# Altium PCB rhd_board_rev1_2_long_link.PcbDoc
Units mm, origin at the board's own origin, x right, y up, seen from the top; angles counter-clockwise.
Board outline 13.23 x 25.69 mm, 3 copper layers (Top Layer, GND, Bottom layer), stack 0.13 mm thick; 28 components, 58 nets, 183 pads, 71 vias.
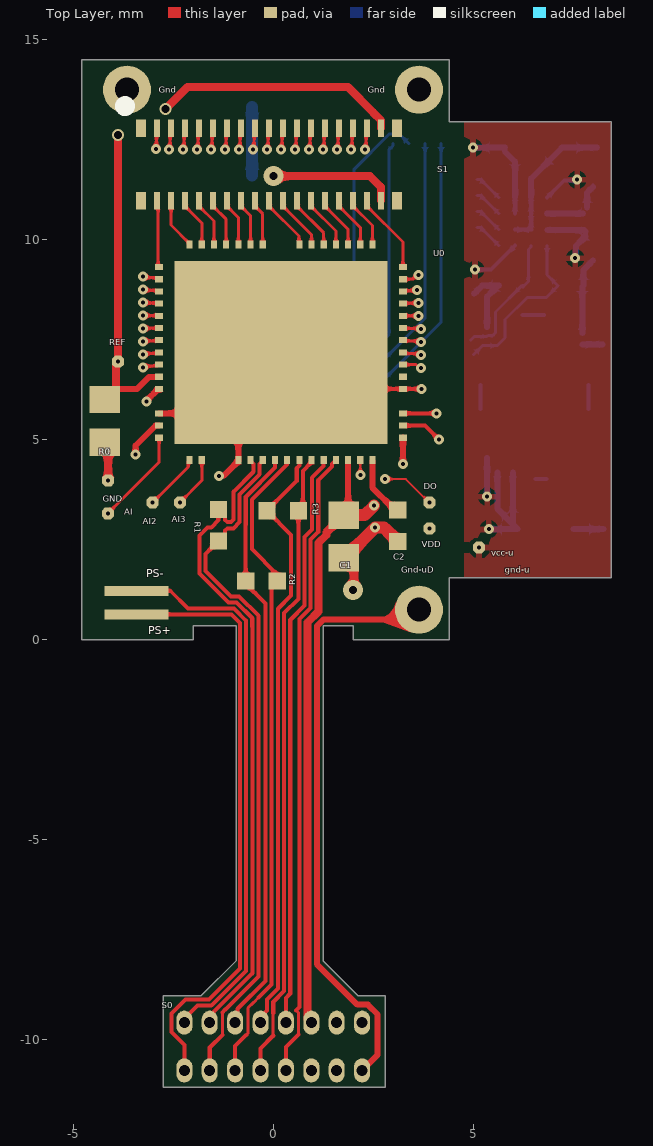
[diagram p0: Top Layer view]
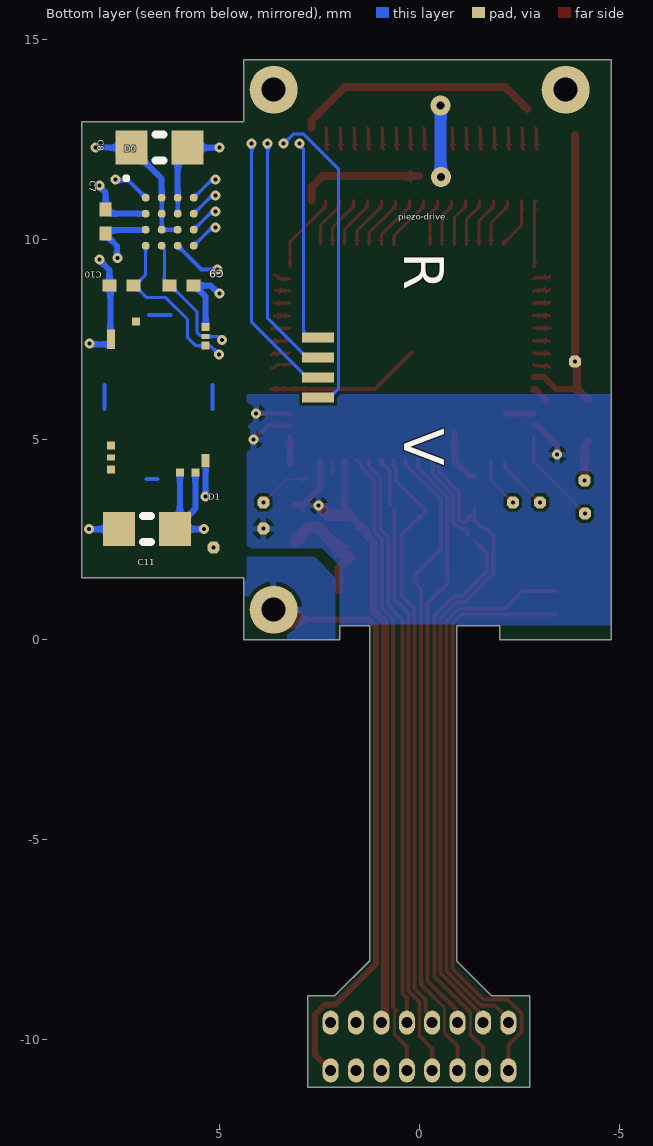
[diagram p1: Bottom layer view, seen from below]
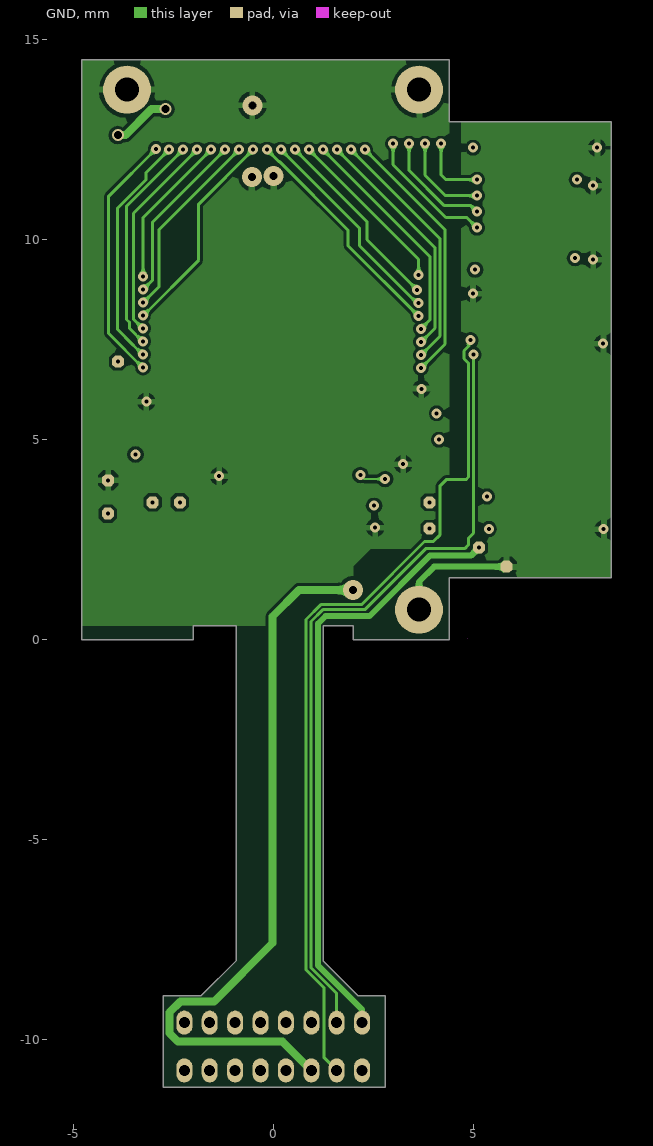
[diagram p2: GND]

## Layer stack, top to bottom
Top Layer: signal copper 0.012
Dielectric 1: core 0.022, FR-4, Dk 4.2
Adhesive 1: prepreg 0.025, Dk 4.2
GND: signal copper 0.012
Adhesive 2: prepreg 0.025, Dk 4.2
Dielectric 2: core 0.022, FR-4, Dk 4.2
Bottom layer: signal copper 0.012

## Board outline
-1.797,-8.902 -0.925,-8.03 -0.925,0.35 -2,0.35 -2,0 -4.782,0 -4.782,14.5 4.4,14.5 4.4,12.95 8.45,12.95 8.45,1.55 4.4,1.55 4.4,0 2,0 2,0.35 1.25,0.35 1.25,-8.025 2.127,-8.902 2.805,-8.902 2.805,-11.193 -2.745,-11.192 -2.745,-8.902
board region omnetics: 1.25,-8.02 1.25,-8.025 2.127,-8.902 2.805,-8.902 2.805,-11.193 -2.745,-11.192 -2.745,-8.902 -1.797,-8.902 -0.925,-8.03 -0.925,-8.02
board region intan-omnetics: -0.925,-8.02 -0.925,0.3 1.25,0.3 1.25,-8.02
board region drive: 4.7,12.95 8.45,12.95 8.45,1.55 4.7,1.55
board region intan-drive: 4.7,1.55 4.4,1.55 4.4,12.95 4.7,12.95
board region intan: -0.925,0.3 -0.925,0.35 -2,0.35 -2,0 -4.783,0 -4.783,14.5 4.4,14.5 4.4,0 2,0 2,0.35 1.25,0.35 1.25,0.3

## Design rules (kind name [scope] priority, off if disabled: settings)
Clearance [All] p1: gap=0.075 ignorepadtopadclearanceinfootprint=TRUE except(0.05: Track-Track)
ComponentClearance [All] p1: gap=0.102 collisioncheckmode=3 verticalgap=0.254 showdistances=TRUE
DiffPairsRouting DiffPair_DiffPairsRouting [InDifferentialPairClass('New Class')] p1: maxlimit=0.203 minlimit=0.051 mostfreqgap=0.102 toplayer_minwidth=0.05 toplayer_maxwidth=0.203 toplayer_prefwidth=0.102 midlayer2_minwidth=0.05 midlayer2_maxwidth=0.203 midlayer2_prefwidth=0.102 bottomlayer_minwidth=0.05 bottomlayer_maxwidth=0.203 bottomlayer_prefwidth=0.102 maxuncoupledlength=12.7
DiffPairsRouting [InDifferentialPairClass('All Differential Pairs')] p2: maxlimit=2.54 minlimit=0.127 mostfreqgap=0.127 toplayer_minwidth=0.076 toplayer_maxwidth=0.381 toplayer_prefwidth=0.254 midlayer2_minwidth=0.076 midlayer2_maxwidth=0.381 midlayer2_prefwidth=0.254 bottomlayer_minwidth=0.076 bottomlayer_maxwidth=0.381 bottomlayer_prefwidth=0.254 maxuncoupledlength=12.7
HoleToHoleClearance [All] p1: gap=0.225 allowstackedmicrovias=TRUE
LayerPairs [All] p1 off: enforce=TRUE
MatchedLengths DiffPair_MatchedLengths [InDifferentialPairClass('New Class')] p1: tolerance=25.4 checknetsindiffpair=TRUE checkdiffpairvsdiffpair=FALSE checkxsignals=FALSE checkothers=FALSE
MatchedLengths DiffPair_MatchedLengths_mosi [InDifferentialPair ('D_MOSI')] p2 off: tolerance=25.4 checknetsindiffpair=TRUE checkdiffpairvsdiffpair=FALSE checkxsignals=FALSE checkothers=FALSE
MinimumSolderMaskSliver [All] p1: minsoldermaskwidth=0.025
PasteMaskExpansion [All] p1 off: expansion=0
PermittedLayers [All] p1: toplayerpermitted=TRUE bottomlayerpermitted=TRUE
PlaneConnect [All] p1: pad.planeconnectstyle=Relief pad.reliefexpansion=0.508 pad.reliefentries=4 pad.reliefconductorwidth=0.254 pad.reliefairgap=0.254 via.planeconnectstyle=Direct via.reliefexpansion=0.508 via.reliefentries=4 via.reliefconductorwidth=0.254 via.reliefairgap=0.254
PolygonConnect [All] p1: connectstyle=Relief reliefconductorwidth=0.15 reliefentries=4 polygonreliefangle="90 Angle" airgapwidth=0.1
RoutingCorners [All] p1: cornerstyle=Round minsetback=2.54 maxsetback=2.54
RoutingVias [All] p1: holewidth=0.1 width=0.35 viastyle="Through Hole" minholewidth=0.1 minwidth=0.25 maxholewidth=0.2 maxwidth=0.5
SilkToSilkClearance [All] p1: silktosilkclearance=0.102
SilkToSolderMaskClearance [IsPad] p1 off: minsilkscreentomaskgap=0.102 clearancetoexposedcopper=TRUE
SolderMaskExpansion [All] p1 off: expansion=0.075
UnRoutedNet [All] p1: checkbadconnections=TRUE
Width Width_elect_net [InNetClass('electrode_net')] p1: maxlimit=0.15 minlimit=0.05 preferedwidth=0.075
Width Width_width [InNetClass('signal_net')] p2: maxlimit=0.15 minlimit=0.05 preferedwidth=0.075
Width Width_power [InNetClass('pow_net')] p3: maxlimit=0.3 minlimit=0.1 preferedwidth=0.2
Width Width_signal [InNetClass('All Nets')] p4: maxlimit=0.15 minlimit=0.05 preferedwidth=0.075
19 further rules are at their usual default settings.

## Classes and differential pairs
net class pow_net: GND NetC2_1 NetR0_2 STIM+ STIM- VCC VCC-udrive
net class signal_net: CS+ CS- MISO+ MISO- MOSI+ MOSI- NetAI2_1 NetAI3_1 NetAI_1 NetS1_B1 NetS1_B2 NetS1_B3 NetS1_B4 NetS1_B5 NetS1_B6 NetS1_B7 NetS1_B8 NetS1_B9 NetS1_B10 NetS1_B11 NetS1_B12 NetS1_B13 NetS1_B14 NetS1_B15 NetS1_B16 SCL SCLK+ SCLK- SDA
differential pair class "New Class": D_CS D_MISO D_MOSI D_SCLK
net class electrode_net: NetS1_B1 NetS1_B2 NetS1_B3 NetS1_B4 NetS1_B5 NetS1_B6 NetS1_B7 NetS1_B8 NetS1_B9 NetS1_B10 NetS1_B11 NetS1_B12 NetS1_B13 NetS1_B14 NetS1_B15 NetS1_B16 S0 S1 S2 S3 S4 S5 S6 S7 S24 S25 S26 S27 S28 S29 S30 S31
differential pair D_SCLK: +SCLK+ -SCLK-
differential pair D_CS: +CS+ -CS-
differential pair D_MOSI: +MOSI+ -MOSI-
differential pair D_MISO: +MISO+ -MISO-

## Components (designator, comment, footprint, x,y, rotation, side; value= is the part's Value field where it differs from the comment)
AI "PCB Test Point" TESTPOINT_SMALL#1 -4.13,3.155 r0 top
AI2 "PCB Test Point" TESTPOINT_SMALL#1 -3.007,3.433 r90 top
AI3 "PCB Test Point" TESTPOINT_SMALL#1 -2.328,3.433 r90 top
C1 "Capacitor" 0402 1.77,2.584 r270 top
C2 "Capacitor" 0201 3.117,2.85 r270 top
C7 "470n" CAPC0603X03L 7.85,10.45 r270 bottom
C8 "10u" CAPC1608X09L 6.5,12.3 r180 bottom
C9 "470n" CAPC0603X03L 5.95,8.85 r0 bottom
C10 "470n" CAPC0603X03L 7.45,8.85 r0 bottom
C11 "10u" CAPC1608X09L 6.818,2.768 r0 bottom
D0 "NSD-2101" BGA16C40P4X4_175X175X63 6.25,10.45 r180 bottom
D1 "NSE-5310_FC" NSE-5310_FC 7.157,4.07 r90 bottom
DO "PCB Test Point" TESTPOINT_SMALL#1 3.91,3.433 r90 top
GND "PCB Test Point" TESTPOINT_SMALL#1 -4.122,3.985 r90 top
gnd-u "PCB Test Point" TESTPOINT_SMALL#2 5.887,2.062 r90 top
piezo-drive "sql-rv-1.8-6-12" sql-rv-1.8-6-12 -1.51,10.235 r0 bottom
PS+ "2-2" KP-025-04 -3.42,0.633 r180 top
PS- "2-2" KP-025-04 -3.42,1.225 r180 top
R0 "Resistor" 0402 -4.207,5.473 r90 top
R1 "Resistor" 0201 -1.365,2.863 r270 top
R2 "Resistor" 0201 -0.29,1.468 r0 top
R3 "Resistor" 0201 0.241,3.227 r0 top
REF "PCB Test Point" TESTPOINT_SMALL#3 -3.878,6.95 r90 top
S0 "Omnetics_PZN-16-DD" OMNETICS_PZN-16-DD 0.002,-10.195 r180 top
S1 "Molex 3.5mm Pitch Slimstack 34 pin connector" MOLEX_504622-3412 -0.1,11.842 r0 top
U0 "Intan Technologies RHD2132 chip" RHD2000_56PIN_COB 0.2,7.184 r0 top
vcc-u "PCB Test Point" TESTPOINT_SMALL#1 5.15,2.305 r90 top
VDD "PCB Test Point" TESTPOINT_SMALL#1 3.91,2.78 r90 top

## Footprints (in the part's own frame and the unit in brackets; to place one, negate y for a bottom-side part, rotate by r counter-clockwise, add the part's x,y. Pads: shape width x height; smd on the part's side, far side on the other; paste and mask are expansions set on the pad)
0201 [mil]
  rect 17x17 smd: 1(-15.5,0) 2(15.5,0)
0402 [mil]
  rect 27x30 smd: 1(-21,0) 2(21,0)
BGA16C40P4X4_175X175X63 [mm]
  round 0.2 smd: A1(-0.6,0.6) A2(-0.2,0.6) A3(0.2,0.6) A4(0.6,0.6) B1(-0.6,0.2) B2(-0.2,0.2) B3(0.2,0.2) B4(0.6,0.2) C1(-0.6,-0.2) C2(-0.2,-0.2) C3(0.2,-0.2) C4(0.6,-0.2) D1(-0.6,-0.6) D2(-0.2,-0.6) D3(0.2,-0.6) D4(0.6,-0.6)
  silkscreen extent -1.14,1.04 -1.04,1.14, body extent -0.87,-0.88 0.88,0.87, height 0.25
CAPC0603X03L [mm]
  rect 0.35x0.3 smd: 1(-0.3,0) 2(0.3,0)
  body extent -0.67,-0.35 0.67,0.35, height 0.33
CAPC1608X09L [mm]
  rect 0.8x0.85 smd: 1(-0.7,0) 2(0.7,0)
  silkscreen extent -0.1,-0.33 0.1,0.33, body extent -1.25,-0.58 1.25,0.58, height 0.95
KP-025-04 [mm]
  rect 1.6x0.25 smd: 1(0,0)
  body extent -0.9,-0.23 0.9,0.23, height 0.03
MOLEX_504622-3412 [mm]
  rect 0.25x0.435 smd paste+0 mask+0.035: A(-3.2,0.95) B(3.2,0.95) C(-3.2,-0.865) D(3.2,-0.865)
  rect 0.16x0.435 smd paste+0 mask+0.035: B1(-2.8,-0.865) B2(-2.45,-0.865) B3(-2.1,-0.865) B4(-1.75,-0.865) B5(-1.4,-0.865) B6(-1.05,-0.865) B7(-0.7,-0.865) B8(-0.35,-0.865) B9(0,-0.865) B10(0.35,-0.865) B11(0.7,-0.865) B12(1.05,-0.865) B13(1.4,-0.865) B14(1.75,-0.865) B15(2.1,-0.865) B16(2.45,-0.865) B17(2.8,-0.865) T1(-2.8,0.95) T2(-2.45,0.95) T3(-2.1,0.95) T4(-1.75,0.95) T5(-1.4,0.95) T6(-1.05,0.95) T7(-0.7,0.95) T8(-0.35,0.95) T9(0,0.95) T10(0.35,0.95) T11(0.7,0.95) T12(1.05,0.95) T13(1.4,0.95) T14(1.75,0.95) T15(2.1,0.95) T16(2.45,0.95) T17(2.8,0.95)
  silkscreen extent -3.72,1.38 -3.47,1.62, body extent -3.62,-1 3.62,1, height 0.46
NSE-5310_FC [mm]
  rect 0.2x0.2 smd: 3(0.19,0.56) 5(0.781,0.56) 7(3.295,0.56) 8(3.484,0.56) 8(3.587,0.56) 9(3.888,-0.057) 11(3.75,-1.807) 13(3.28,-1.807) 18(0.351,-1.807) 18(0.468,-1.807) 19(0.112,-1.549) 19(0.112,-1.161)
  rect 0.15x0.2 smd: 4(0.48,0.56)
  rect 0.116x0.116 smd: 8(3.484,0.56) 18(0.401,-1.807)
  rect 0.116x0.2 smd: 12(3.51,-1.807)
  Top Layer lines w0.1: 1.7,-1.973 2.3,-1.973 ; 4.05,-0.923 4.05,-0.386 ; -0.05,-0.6 -0.05,-0.323 ; 1.7,0.727 2.3,0.727
  body extent -0.2,-2.12 4.2,0.88, height 1.02
OMNETICS_PZN-16-DD [mm]
  oval 0.4x0.6 hole 0.275 mask+0.05: B1(2.219,0.571) B2(1.584,0.571) B3(0.949,0.571) B4(0.314,0.571) B5(-0.321,0.571) B6(-0.956,0.571) B7(-1.591,0.571) B8(-2.226,0.571) T1(2.219,-0.622) T2(1.584,-0.622) T3(0.949,-0.622) T4(0.314,-0.622) T5(-0.321,-0.622) T6(-0.956,-0.622) T7(-1.591,-0.622) T8(-2.226,-0.622)
RHD2000_56PIN_COB [mil]
  rect 8x6 smd paste+0: 1(-120,84) 2(-120,72) 3(-120,60) 4(-120,48) 5(-120,36) 6(-120,24) 7(-120,12) 8(-120,0) 9(-120,-12) 10(-120,-24) 11(-120,-36) 12(-120,-60) 13(-120,-72) 14(-120,-84) 29(120,-84) 30(120,-72) 31(120,-60) 32(120,-36) 33(120,-24) 34(120,-12) 35(120,0) 36(120,12) 37(120,24) 38(120,36) 39(120,48) 40(120,60) 41(120,72) 42(120,84)
  rect 6x8 smd paste+0: 15(-90,-106) 16(-78,-106) 17(-42,-106) 18(-30,-106) 19(-18,-106) 20(-6,-106) 21(6,-106) 22(18,-106) 23(30,-106) 24(42,-106) 25(54,-106) 26(66,-106) 27(78,-106) 28(90,-106) 43(90,106) 44(78,106) 45(66,106) 46(54,106) 47(42,106) 48(30,106) 49(18,106) 50(-18,106) 51(-30,106) 52(-42,106) 53(-54,106) 54(-66,106) 55(-78,106) 56(-90,106)
  rect 210x180 smd paste+0: CENTER(0,0)
sql-rv-1.8-6-12 [mm]
  rect 0.8x0.25 smd: P1-1(4.05,2.685) P1-2(4.05,4.185) P2-1(4.05,3.185) P2-2(4.05,3.685)
  Top Layer region: 0.05,0
  Top Layer region: 0.05,0
  body extent 0.05,0 4.55,6, height 2.77
TESTPOINT_SMALL#1 [mm]
  oct 0.3x0.3 hole 0.1: 1(0,0)
TESTPOINT_SMALL#2 [mm]
  oct 0.3x0.3 on Mid2: gndupad(-0.237,0.05)
TESTPOINT_SMALL#3 [mm]
  oct 0.3x0.3 hole 0.1 paste+0.1: 1(0,0)

## Part data
AI AI2 AI3 DO GND gnd-u REF vcc-u VDD: library part TESTPOINT_SMALL, DeviceName=_SMALL, DeviceSetName=TESTPOINT, GateName_1=TP$1, LibraryName=RHD2000_eval_board, Package=TESTPOINT_SMALL, SymbolName_1=TESTPOINT
C1: library part C_100nf, "ceramic capacitor (25 V). For pwer supply decoupling", Package=0402, Supplier Part Number 1=445-4964-2-ND, DeviceName=_0402, DeviceSetName=C, GateName_1=C, LibraryName=RHD2000_eval_board, Supplier 1=Digi-Key, SymbolName_1=C
C2: library part C_10nF, "ceramic 16v", Package=0201, Supplier Part Number 1=311-1404-2-ND, DeviceName=_0201, DeviceSetName=C, GateName_1=C, LibraryName=RHD2000_eval_board, Supplier 1=Digi-Key, SymbolName_1=C
C7 C9 C10: library part Cap-603, "Capacitor", Supplier Part Number 1=963-AMK063BJ474MP-F, LatestRevisionDate=10-Jul-2010, Publisher=RVS, Supplier 1=Mouser
C8 C11: library part Cap-1608, "Capacitor", Supplier Part Number 1=667-ECJ-1VB0J106M, LatestRevisionDate=10-Jul-2010, Publisher=RVS, Supplier 1=Mouser
piezo-drive: "Squiggle motor"
PS+ PS-: library part KP-025X04
R0: library part R_0ohm, "resistor 0ohm", Package=0402, Supplier Part Number 1=P0.0JTR-ND, DeviceName=_0402, DeviceSetName=R, GateName_1=R, LibraryName=RHD2000_eval_board, Supplier 1=Digi-Key, SymbolName_1=R
R1 R2 R3: library part R_100_LVDS, "100ohm resistor for lvds pair in 64ch", Package=0201, Supplier Part Number 1=ERJ-1GNF1000C-ND, DeviceName=_0201, DeviceSetName=R, GateName_1=R, LibraryName=RHD2000_eval_board, Supplier 1=Digi-Key, SymbolName_1=R
S0: Package=OMNETICS_PZN-12-AA, DeviceSetName=RHD2000-CABLE-DAQ-SIDE, GateName_1=A, LibraryName=RHD2000_eval_board, SymbolName_1=RHD2000-CABLE
S1: library part MOLEX_504622-3412, Package=OMNETICS_A79024, Supplier Part Number 1=538-504622-3410, DeviceSetName=OMNETICS_A79024, GateName_1=A, LibraryName=RHD2000_eval_board, Supplier 1=Mouser, SymbolName_1=OMNETICS_A7902X
U0: library part RHD2132_COB, Package=RHD2000_56PIN_COB, DeviceName=_COB, DeviceSetName=RHD2132, GateName_1=A, LibraryName=RHD2000, SymbolName_1=RHD2132

## Free pads (board coordinates)
  round 1.2 hole 0.6: 2(-3.65,13.75) 2(3.65,0.75) 2(3.65,13.75)

## Via types
v1: diameter 0.25, hole 0.1, Top Layer to GND, tented both sides, 36 vias
v2: diameter 0.25, hole 0.1, GND to Bottom layer, 13 vias
v3: diameter 0.25, hole 0.1, Top Layer to Bottom layer, 7 vias
v4: diameter 0.25, hole 0.1, Top Layer to Bottom layer, tented both sides, 3 vias
v5: diameter 0.25, hole 0.1, Top Layer to GND, 3 vias
v6: diameter 0.25, hole 0.1, GND to Bottom layer, tented both sides, 3 vias
v7: diameter 0.3, hole 0.2, Top Layer to GND, tented both sides, 2 vias
v8: diameter 0.5, hole 0.2, Top Layer to GND, tented both sides, 2 vias
v9: diameter 0.5, hole 0.2, GND to Bottom layer, tented both sides, 2 vias

## Nets (pads, with @x,y where several pads share a name; then routed paths per layer and width w, separated by ;. In a path a pad name is that pad's centre, name@x,y a point inside that pad or via, vN(x,y) a via of type N, cw(c..) or ccw(c..) an arc to the next point about the centre after c; other vN are vias at no path point)
1-1: D0.D4 piezo-drive.P1-1 | length 9.2
  GND w0.075: v2(3,12.4) 3,11.875 4.319,10.556 4.844,10.556 v2(5.1,10.3)
  Bottom layer w0.075: piezo-drive.P1-1 2.815,7.55 2.902,7.637 2.902,12.255 3,12.353 v2(3,12.4) ; v2(5.1,10.3) 5.2,10.3 D0.D4
1-2: D0.C4 piezo-drive.P1-2 | length 11.4
  GND w0.075: v2(3.4,12.4) 3.4,11.735 4.283,10.853 4.948,10.853 v2(5.1,10.7)
  Bottom layer w0.075: piezo-drive.P1-2 2.265,6.05 2.027,6.288 2.027,11.763 2.902,12.638 3.162,12.638 v2(3.4,12.4) ; v2(5.1,10.7) 5.2,10.7 D0.C4
2-1: D0.B4 piezo-drive.P2-1 | length 9.1
  GND w0.075: v2(3.8,12.4) 3.8,11.612 4.312,11.1 v2(5.1,11.1)
  Bottom layer w0.075: piezo-drive.P2-1 2.815,7.05 3.8,8.035 v2(3.8,12.4) ; v2(5.1,11.1) 5.2,11.1 D0.B4
2-2: D0.A4 piezo-drive.P2-2 | length 9.2
  GND w0.075: v2(4.2,12.4) 4.2,11.622 4.322,11.5 v2(5.1,11.5)
  Bottom layer w0.075: piezo-drive.P2-2 2.815,6.55 4.2,7.935 v2(4.2,12.4) ; v2(5.1,11.5) 5.2,11.5 D0.A4
CS+: R1.2 S0.B2 U0.19 | length 16.9
  Top Layer w0.075: -1.265,-9.88 -1.265,-9.315
  Top Layer w0.102: S0.B2 -1.582,-10.197 -1.265,-9.88 ; R1.2 -1.685,2.149 -1.685,1.717 -1.051,1.083 -0.85,1.083 -0.367,0.6 -0.367,0.399 -0.365,0.397 -0.365,-8.422 -1.192,-9.249 -1.199,-9.249 -1.265,-9.315 ; R1.2@-1.2,2.634 -1.2,2.727 -1.14,2.786 -0.993,2.786 -0.834,2.945 -0.834,3.636 -0.333,4.137 -0.333,4.39 -0.257,4.466 U0.19
CS-: R1.1 S0.T2 U0.18 | length 16.4
  Top Layer w0.102: S0.T2 -1.582,-9.393 -1.468,-9.278 -1.458,-9.278 -0.517,-8.337 -0.517,0.334 -0.519,0.336 -0.519,0.537 -0.913,0.931 -1.114,0.931 -1.837,1.654 -1.837,2.606 -1.633,2.811 -1.544,2.811 -1.365,2.99 R1.1@-1.365,3.091 ; R1.1 R1.1@-1.365,3.091 ; U0.18 -0.562,4.466 -0.486,4.39 -0.486,4.2 -0.986,3.699 -0.986,3.009 -1.056,2.939 -1.14,2.939 -1.2,2.998 -1.2,3.091 R1.1@-1.365,3.091
GND: C1.2 C2.2 GND.1 pad.2@3.65,13.75 pad.2@-3.65,13.75 R0.1 S0.B6 S1.B17 U0.11 U0.12 U0.17 U0.29 U0.32 U0.CENTER | length 33.8
  Top Layer w0.1: U0.CENTER 1.114,6.27 v1(3.71,6.27)
  Top Layer w0.15: v1(-3.168,5.95) -3.168,5.975 -2.873,6.27 U0.11 ; U0.12 U0.CENTER@-2.148,5.66 ; v5(-1.346,4.092) -1.327,4.111 -1.222,4.111 -0.867,4.466 U0.17 U0.CENTER@-0.867,5.15 ; U0.29@3.249,5.05 v5(3.25,4.392) v5(3.25,4.392)
  Top Layer w0.2: R0.1 -4.122,4.854 GND.1 ; v8(0.015,11.588) 2.427,11.588 2.676,11.339 2.7,11.315 S1.B17 ; C1.2 2.025,1.796 2.025,1.242 v8(1.999,1.242)
  Top Layer w0.3: C1.2 1.801,2.051 v5(2.55,2.8) 2.774,2.8 C2.2
  GND w0.2: S0.B6 0.24,-10.048 -2.373,-10.048 -2.592,-9.829 -2.592,-9.318 -2.316,-9.041 -1.472,-9.041 -0.018,-7.587 -0.018,0.575 0.65,1.242 v8(1.999,1.242)
  Bottom layer w0.3: v9@-0.527,11.609 -0.522,11.614 -0.522,13.317 v9@-0.527,13.323
  other v9: -0.527,11.572 -0.517,13.36
GND-udrive: C7.1 C8.1 C9.1 C10.2 C11.2 D0.A2 D0.B1 D0.B2 D0.C2 D0.C3 D1.7 D1.8 D1.11 gnd-u.gndupad pad.2@3.65,0.75 S0.B8 | length 28.1
  Top Layer w0.15: S0.B8 2.617,-10.376 2.617,-9.369 2.372,-9.123 2.108,-9.123 1.098,-8.113 1.098,0.34 1.257,0.5 3.4,0.5 pad.2@3.65,0.75
  GND w0.15: pad.2@3.65,0.75 3.65,1.445 4.03,1.825 gnd-u.gndupad
  Bottom layer w0.1: v2(5,8.65) v2@5.027,8.65 ; D0.C3 D0.C2@6.463,10.25 ; D0.C2 6.45,10.637 D0.B2@6.463,10.65 ; D0.B2 D0.A2 ; C8.1@7.2,12.275 C8.1 ; D1.7 D1.7@7.733,7.383 ; D1.8@7.716,7.65 D1.8@7.733,7.667 ; C10.2@7.733,8.833 C10.2@7.756,8.856 ; v2@8,9.485 v2(8,9.5) ; v2@8,11.322 v2(8,11.35) ; v2@8.233,7.383 v2(8.25,7.4)
  Bottom layer w0.15: v2@5.027,8.65 5.227,8.85 C9.1 ; D1.11 5.35,8.575 C9.1@5.625,8.85 ; D0.A2 6.45,11.525 C8.1@7.2,12.275 ; D0.B1@6.85,10.65 C7.1@7.75,10.65 ; C8.1@7.225,12.3 v2(8.1,12.3) ; C11.2 v6(8.263,2.768) ; D1.7@7.733,7.383 v2@8.233,7.383 ; D1.8@7.733,7.667 C10.2@7.733,8.833 ; C10.2@7.756,8.856 7.756,9.241 v2@8,9.485 ; C7.1@7.85,10.8 7.85,11.172 v2@8,11.322
MISO+: S0.B5 U0.25 | length 15.8
  Top Layer w0.075: 0.57,-9.26 0.58,-9.27 0.635,-9.325 0.635,-9.865
  Top Layer w0.102: S0.B5 0.323,-10.177 0.635,-9.865 ; 0.58,-9.27 0.667,-9.183 0.667,0.519 0.939,0.791 0.939,2.506 1.13,2.697 1.13,3.987 1.469,4.326 1.469,4.389 U0.25
MISO-: S0.T5 U0.24 | length 14.5
  Top Layer w0.102: S0.T5 0.323,-8.955 0.431,-8.847 0.431,0.498 0.787,0.854 0.787,2.569 0.978,2.76 0.978,4.05 1.267,4.339 U0.24
MOSI+: R3.2 S0.B4 U0.23 | length 15.6
  Top Layer w0.075: 0.005,-9.9 0.005,-9.33
  Top Layer w0.102: S0.B4 -0.312,-10.217 0.005,-9.9 ; 0.005,-9.33 0.005,-9.058 0.279,-8.784 0.279,0.664 0.635,1.02 R3.2 ; R3.2@0.745,3.399 0.745,4.224 0.962,4.441 U0.23
MOSI-: R3.1 S0.T4 U0.22 | length 15
  Top Layer w0.102: S0.T4 -0.312,-9.43 -0.147,-9.265 -0.147,-8.995 0.127,-8.721 0.127,0.775 0.453,1.101 0.453,2.622 R3.1 0.593,3.972 0.593,4.287 0.657,4.351 U0.22
NetAI2_1: AI2.1 U0.15 | length 1.4
  Top Layer w0.075: AI2.1 -2.125,4.315 -2.125,4.453 U0.15
NetAI3_1: AI3.1 U0.16 | length 1.3
  Top Layer w0.075: AI3.1 -1.781,3.979 U0.16
NetAI_1: AI.1 U0.14 | length 2.4
  Top Layer w0.075: AI.1 -2.848,4.437 U0.14
NetC2_1: C2.1 U0.28 | length 1.5
  Top Layer w0.152: U0.28@2.486,4.466 2.486,3.804 2.924,3.366 C2.1@3.13,3.366
NetDO_1: DO.1 U0.27 | length 2.4
  Top Layer w0.05: v1(2.181,4.116) U0.27 ; v1(2.801,4.017) 3.321,4.017 DO.1@3.898,3.44
  GND w0.05: v1(2.181,4.116) 2.28,4.017 v1(2.801,4.017)
NetR0_2: R0.2 REF.1 S1.T17 U0.10 | length 15.6
  Top Layer w0.15: R0.2@-3.943,6.27 -3.399,6.27 -3.096,6.573 -2.849,6.573 U0.10
  Top Layer w0.2: R0.2 -3.965,6.249 -3.926,6.249 -3.926,6.902 REF.1 v7(-3.878,12.614) ; v7(-2.69,13.265) -2.14,13.815 1.875,13.815 2.502,13.188 2.502,13.184 2.7,12.987 S1.T17
  GND w0.2: v7(-3.878,12.614) -3.69,12.614 -3.039,13.265 v7(-2.69,13.265)
NetS1_B1: S1.B1 U0.1 | length 1.7
  Top Layer w0.075: S1.B1 -2.874,10.951 -2.874,9.344 U0.1
NetS1_B2: S1.B2 U0.56 | length 1.3
  Top Layer w0.075: S1.B2 -2.55,10.366 -2.086,9.902 U0.56
NetS1_B3: S1.B3 U0.55 | length 1.3
  Top Layer w0.075: S1.B3 -2.2,10.839 -1.781,10.421 U0.55
NetS1_B4: S1.B4 U0.54 | length 1.3
  Top Layer w0.075: S1.B4 -1.85,10.839 -1.476,10.466 U0.54
NetS1_B5: S1.B5 U0.53 | length 1.2
  Top Layer w0.075: S1.B5 -1.5,10.839 -1.172,10.511 U0.53
NetS1_B6: S1.B6 U0.52 | length 1.2
  Top Layer w0.075: S1.B6 -1.15,10.839 -0.867,10.556 U0.52
NetS1_B7: S1.B7 U0.51 | length 1.2
  Top Layer w0.075: S1.B7 -0.8,10.839 -0.562,10.601 U0.51
NetS1_B8: S1.B8 U0.50 | length 1.2
  Top Layer w0.075: S1.B8 -0.45,10.839 -0.257,10.647 U0.50
NetS1_B9: S1.B9 U0.49 | length 1.4
  Top Layer w0.075: S1.B9 -0.1,10.839 0.649,10.09 0.649,9.885 U0.49
NetS1_B10: S1.B10 U0.48 | length 1.4
  Top Layer w0.075: S1.B10 0.25,10.839 0.962,10.127 U0.48
NetS1_B11: S1.B11 U0.47 | length 1.4
  Top Layer w0.075: S1.B11 0.6,10.839 1.267,10.173 U0.47
NetS1_B12: S1.B12 U0.46 | length 1.4
  Top Layer w0.075: S1.B12 0.95,10.839 1.572,10.218 U0.46
NetS1_B13: S1.B13 U0.45 | length 1.3
  Top Layer w0.075: S1.B13 1.3,10.839 1.876,10.263 U0.45
NetS1_B14: S1.B14 U0.44 | length 1.3
  Top Layer w0.075: S1.B14 1.65,10.839 2.181,10.308 U0.44
NetS1_B15: S1.B15 U0.43 | length 1.3
  Top Layer w0.075: S1.B15 2,10.839 2.486,10.353 U0.43
NetS1_B16: S1.B16 U0.42 | length 2
  Top Layer w0.075: S1.B16 2.35,10.839 3.248,9.941 U0.42
S0: S1.T1 U0.9 | length 7.3
  Top Layer w0.075: v1(-3.25,6.808) -3.217,6.842 -2.885,6.842 U0.9 ; v1(-2.927,12.269) -2.913,12.283 -2.913,12.779 S1.T1
  GND w0.075: v1(-3.25,6.808) -3.261,6.808 -4.108,7.655 -4.108,11.089 v1(-2.927,12.269)
S1: S1.T2 U0.8 | length 6.9
  Top Layer w0.075: v1(-3.25,7.133) -3.225,7.159 -2.873,7.159 U0.8 ; v1(-2.6,12.25) -2.575,12.275 -2.575,12.767 S1.T2
  GND w0.075: v1(-3.25,7.133) -3.261,7.133 -3.693,7.565 -3.693,7.568 -3.882,7.757 -3.882,10.794 -3.17,11.506 -3.17,11.679 v1(-2.6,12.25)
S2: S1.T3 U0.7 | length 6.5
  Top Layer w0.075: v1(-3.25,7.458) -3.235,7.474 -2.863,7.474 U0.7 ; v1(-2.25,12.25) -2.225,12.275 -2.225,12.767 S1.T3
  GND w0.075: v1(-3.25,7.458) -3.261,7.458 -3.583,7.78 -3.583,7.928 -3.662,8.008 -3.662,10.837 v1(-2.25,12.25)
S3: S1.T4 U0.6 | length 6.2
  Top Layer w0.075: v1(-3.25,7.783) -3.245,7.789 -2.853,7.789 U0.6 ; v1(-1.9,12.25) -1.875,12.275 -1.875,12.767 S1.T4
  GND w0.075: v1(-3.25,7.783) -3.261,7.783 -3.488,8.01 -3.488,9.182 -3.49,9.184 -3.49,10.66 v1(-1.9,12.25)
S4: S1.T5 U0.2 | length 4.9
  Top Layer w0.075: v1(-3.25,9.084) -3.217,9.05 -2.885,9.05 U0.2 ; v1(-1.55,12.25) -1.525,12.275 -1.525,12.767 S1.T5
  GND w0.075: v1(-3.25,9.084) -3.25,10.55 v1(-1.55,12.25)
S5: S1.T6 U0.3 | length 5.3
  Top Layer w0.075: v1(-3.25,8.758) -3.225,8.733 -2.873,8.733 U0.3 ; v1(-1.2,12.25) -1.175,12.275 -1.175,12.767 S1.T6
  GND w0.075: v1(-3.25,8.758) -3.239,8.758 -3.012,8.985 -3.012,10.437 v1(-1.2,12.25)
S6: S1.T7 U0.4 | length 5.8
  Top Layer w0.075: v1(-0.85,12.25) -0.825,12.275 -0.825,12.767 S1.T7
  Top Layer w0.076: v1(-3.25,8.433) -3.235,8.418 -2.863,8.418 U0.4
  GND w0.075: -2.85,9.875 -2.85,10.25 v1(-0.85,12.25)
  GND w0.076: v1(-3.25,8.433) -3.238,8.433 -2.85,8.822 -2.85,9.875
S7: S1.T8 U0.5 | length 6.3
  Top Layer w0.075: v1(-3.25,8.108) -3.245,8.103 -2.853,8.103 U0.5
  Top Layer w0.076: v1(-0.5,12.25) -0.475,12.275 -0.475,12.767 S1.T8
  GND w0.075: v1(-3.25,8.108) -3.239,8.108 -1.86,9.487 -1.86,10.89 v1(-0.5,12.25)
S24: S1.T9 U0.38 | length 6.7
  Top Layer w0.075: v1(-0.15,12.25) -0.125,12.275 -0.125,12.767 S1.T9 ; U0.38 v1(3.639,8.098)
  GND w0.075: v1(-0.15,12.25) 0.15,11.95 0.165,11.95 1.871,10.244 1.871,9.856 3.629,8.098 v1(3.639,8.098)
S25: S1.T10 U0.39 | length 6.2
  Top Layer w0.075: v1(0.2,12.25) 0.225,12.275 0.225,12.767 S1.T10 ; U0.39 3.258,8.413 3.629,8.413 v1(3.639,8.423)
  GND w0.075: v1(0.2,12.25) 2.163,10.287 2.163,9.852 3.557,8.457 3.606,8.457 v1(3.639,8.423)
S26: S1.T11 U0.40 | length 5.7
  Top Layer w0.075: v1(0.55,12.25) 0.575,12.275 0.575,12.767 S1.T11 ; U0.40 3.268,8.728 3.581,8.728 v1(3.602,8.748)
  GND w0.075: v1(0.55,12.25) 2.35,10.45 2.35,10 v1(3.602,8.748)
S27: S1.T12 U0.41 | length 5.3
  Top Layer w0.075: v1(0.9,12.25) 0.925,12.275 0.925,12.767 S1.T12 ; U0.41 3.486,9.013 3.592,9.119 v1(3.639,9.119)
  GND w0.075: v1(0.9,12.25) 3.639,9.511 v1(3.639,9.119)
S28: S1.T13 U0.37 | length 6.7
  Top Layer w0.075: v1(1.25,12.25) 1.275,12.275 1.275,12.767 S1.T13 ; U0.37 3.258,7.783 3.69,7.783 v1(3.7,7.773)
  GND w0.075: v1(1.25,12.25) 3.925,9.575 3.925,7.998 v1(3.7,7.773)
S29: S1.T14 U0.36 | length 7
  Top Layer w0.075: v1(1.6,12.25) 1.625,12.275 1.625,12.767 S1.T14 ; U0.36 3.268,7.469 3.68,7.469 v1(3.7,7.448)
  GND w0.075: v1(1.6,12.25) 4.05,9.8 4.05,7.788 3.711,7.448 v1(3.7,7.448)
S30: S1.T15 U0.35 | length 7.3
  Top Layer w0.075: v1(1.95,12.25) 1.975,12.275 1.975,12.767 S1.T15 ; U0.35 3.278,7.154 3.67,7.154 v1(3.7,7.123)
  GND w0.075: v1(1.95,12.25) 4.175,10.025 4.175,7.588 3.711,7.123 v1(3.7,7.123)
S31: S1.T16 U0.34 | length 7.6
  Top Layer w0.075: v1(2.3,12.25) 2.325,12.275 2.325,12.767 S1.T16 ; U0.34 3.572,6.879 3.653,6.798 v1(3.7,6.798)
  GND w0.075: v1(2.3,12.25) 4.3,10.25 4.3,7.387 3.711,6.798 v1(3.7,6.798)
SCL: C10.1 D0.D1 D1.13 S0.T7 | length 24
  GND w0.075: S0.T7 1.592,-8.845 0.953,-8.205 0.953,-3.238 0.95,-3.235 0.95,0.457 1.245,0.752 2.295,0.752 3.817,2.275 4.79,2.275 4.887,2.372 4.887,2.537 5.012,2.662 v6(5.012,7.125)
  Bottom layer w0.075: v6(5.012,7.125) 5.238,7.35 D1.13 5.6,7.35 5.8,7.55 5.8,8.003 6.347,8.55 6.825,8.55 7.125,8.85 6.85,9.125 D0.D1
SCLK+: R2.2 S0.B3 U0.21 | length 16.4
  Top Layer w0.075: -0.67,-9.883 -0.625,-9.838 -0.625,-9.202 -0.497,-9.074 -0.489,-9.074 -0.361,-8.946
  Top Layer w0.102: S0.B3 -0.947,-10.161 -0.67,-9.883 ; -0.361,-8.946 -0.038,-8.622 -0.038,-8.527 -0.035,-8.525 -0.035,1.265 R2.2@0.168,1.468 ; R2.2 0.104,1.636 -0.531,2.271 -0.531,2.818 -0.53,2.82 -0.53,3.5 0.352,4.382 U0.21 U0.21@0.354,4.49
SCLK-: R2.1 S0.T3 U0.20 | length 14.9
  Top Layer w0.102: S0.T3 -0.89,-9.516 -0.89,-9.225 -0.192,-8.527 -0.192,0.904 R2.1@-0.72,1.431 ; R2.1 -0.684,2.881 -0.682,2.883 -0.682,3.573 0.048,4.303 U0.20
SDA: C9.2 D0.D2 D1.12 S0.B7 | length 25.3
  GND w0.075: 0.822,-3.18 0.822,0.506 1.193,0.877 ; 0.823,-3.181 0.823,-8.252 1.277,-8.707 1.277,-10.452 S0.B7 ; 1.827,0.877 1.193,0.877 ; v6(4.938,7.49) 4.887,7.44 4.887,7.336 4.775,7.223 4.775,7.027 4.887,6.914 4.887,4.068 4.822,4.002 4.33,4.002 4.177,3.85 4.177,2.625 4.008,2.455 3.788,2.455 2.21,0.877 1.193,0.877
  Bottom layer w0.075: v6(4.938,7.49) 5.028,7.58 D1.12 5.37,7.601 5.49,7.601 5.563,7.673 5.563,8.193 6.219,8.85 C9.2 6.275,8.85 6.387,8.962 6.387,9.753 6.45,9.817 D0.D2 ; C9.2@6.25,8.805 C9.2@6.25,8.833
STIM+: PS+.1 S0.B1 | length 15.1
  Top Layer w0.1: PS+.1 -2.57,0.633 -2.566,0.63 -1.037,0.63 -0.82,0.413 -0.82,-8.215 -1.583,-8.978 -1.593,-8.978 -1.605,-8.99 -2.193,-8.99 -2.542,-9.339 -2.542,-9.808 -2.217,-10.133 S0.B1
STIM-: PS-.1 S0.T1 | length 14
  Top Layer w0.1: PS-.1 -2.57,1.225 -2.125,0.78 -0.975,0.78 -0.67,0.475 -0.67,-8.277 -1.521,-9.128 -1.53,-9.128 -1.545,-9.142 -1.886,-9.142 -2.217,-9.473 S0.T1
VCC: C1.1 S0.T6 U0.13 U0.26 U0.30 U0.31 VDD.1 | length 18.3
  Top Layer w0.1: U0.30 3.795,5.355 v3(4.15,5) ; U0.31 v3(4.091,5.66)
  Top Layer w0.15: v3(-3.437,4.63) -3.437,4.851 -2.933,5.355 U0.13 ; C1.1@1.876,3.224 U0.26
  Top Layer w0.2: S0.T6 0.867,-9.483 0.867,0.436 1.14,0.708 1.14,2.423 1.331,2.614 1.331,2.678 C1.1 C1.1@1.876,3.224
  Top Layer w0.3: C1.1 2.293,3.117 v4(2.527,3.352)
VCC-udrive: C7.2 C8.2 C11.1 D0.A1 D0.A3 D0.B3 D0.C1 D0.D3 D1.18 D1.19 S0.T8 vcc-u.1 | length 26.2
  GND w0.15: S0.T8 2.227,-9.25 1.128,-8.15 1.128,0.405 1.312,0.59 2.412,0.59 3.93,2.107 4.952,2.107 vcc-u.1
  Bottom layer w0.1: v3(5.05,9.25) 5.45,9.25 D0.D3 ; D0.B3 D0.A3 ; D0.C1 D0.C1@6.859,10.241 ; D0.A1 7.281,11.481 7.581,11.481 v3(7.6,11.5) ; v3(7.55,9.539) v3@7.569,9.558 ; C7.2@7.81,10.085 C7.2@7.81,10.207
  Bottom layer w0.15: v3(5,12.3) C8.2 ; v4(5.35,3.58) 5.35,4.421 5.35,4.471 D1.18@5.35,4.538 ; v4(5.397,2.768) C11.1 C11.1@5.995,2.89 ; D1.19@5.607,4.182 5.607,3.278 C11.1@5.995,2.89 ; C8.2@5.8,12.201 6.05,11.951 D0.A3 ; D1.19@5.995,4.182 C11.1@5.995,2.89 ; D0.C1@6.859,10.241 7.776,10.241 C7.2@7.81,10.207 ; v3@7.569,9.558 7.569,9.844 C7.2@7.81,10.085
pads on no net: D1.3 D1.4 D1.5 D1.9 S1.A S1.B S1.C S1.D U0.33

## Polygon pours and split planes (outlines as drawn)
GND-udrive on GND "GND-UDRIVE_L02_P006" (solid, remove dead copper, pour order 6): 4.7,1.55 8.45,1.55 8.45,12.95 4.7,12.95
GND on GND "GND" (solid, remove dead copper, pour order 2): -4.783,0.35 2,0.35 2,1.839 2.441,2.28 4.4,2.275 4.4,14.5 -4.782,14.5
GND-udrive on Bottom layer "GNDR" (solid, remove dead copper, pour order 10): 2.11,0 2.11,1.55 2.38,1.82 2.63,2.07 4.4,2.07 4.4,0
VCC on Bottom layer "GND" (solid, remove dead copper, pour order 14): -4.782,0.36 2,0.36 2,1.849 2.441,2.29 4.4,2.285 4.4,6.14 -4.782,6.14
VCC-udrive on Top Layer "VCC-UDRIVE" (solid, pour order 8): 8.45,12.95 8.45,1.55 4.7,1.55 4.7,12.95

## Keep-outs
GND:
  region: 4.85,0.034
  region: 4.85,0.034

## Silkscreen, mask and mechanical layers (free items; w line width, h text height)
Top Overlay:
  text "Gnd" at -2.86,13.67 h0.15
  text "Gnd" at 2.37,13.67 h0.15
  text "Gnd-uD" at 3.21,1.67 h0.15
Mechanical 5:
  lines w0.025: 3.476,4.8 14.311,4.8
board_outline:
  lines w0.05: -2,0.35 -0.925,0.35 -0.925,0.305 -0.925,-8.077 -1.723,-8.875 -1.743,-8.875 -2.743,-8.875 -2.743,-11.195 2.787,-11.195 2.787,-8.875 2.029,-8.875 1.25,-8.096 1.25,-7.92 1.25,0.35 2,0.35 ; -2,0.35 -2,0 -4.795,0 -4.795,14.5 4.4,14.5 4.4,12.95 8.45,12.95 ; -2,0.35 -2,0.35 ; 2,0 2,0.35 ; 2,0 2,0 ; 2,0 4.4,0 4.4,1.55 8.45,1.55 8.45,12.95 ; 2,0.35 2,0.35 ; 8.45,12.95 8.45,12.95
flex_regions (Mech11):
  rectangle: -0.925,-3.21 1.25,0.3
  region: 4.4,1.55 4.7,1.55 4.7,12.95 4.4,12.95
  lines w0.1: -0.925,-8.055 1.25,-8.055 1.25,0.3 -0.925,0.3 -0.925,-8.055

## Text inside footprints (layer, text, board x,y; h text height)
piezo-drive: Bottom Overlay "R" at 0.39,9.685 h1 r90; Bottom Overlay "V" at 0.39,5.285 h1 r90; Bottom assembly "R" at 0.39,9.685 h1 r90; Bottom assembly "V" at 0.39,5.285 h1 r90; Bottom assembly "V" at 0.39,5.285 h1 r90; Bottom assembly "R" at 0.39,9.685 h1 r90